# Altium PCB RFCARD-MB-NEW.PcbDoc
Units mm, origin at the board's own origin, x right, y up, seen from the top; angles counter-clockwise.
Board outline 43.48 x 35.86 mm, 6 copper layers (Top Layer, Mid-Layer 1, Mid-Layer 2, Internal Plane 1, Internal Plane 2, Bottom Layer); 6 components, 13 nets, 34 pads, 11 vias.
Unrouted connection lines stored in the file: 6.
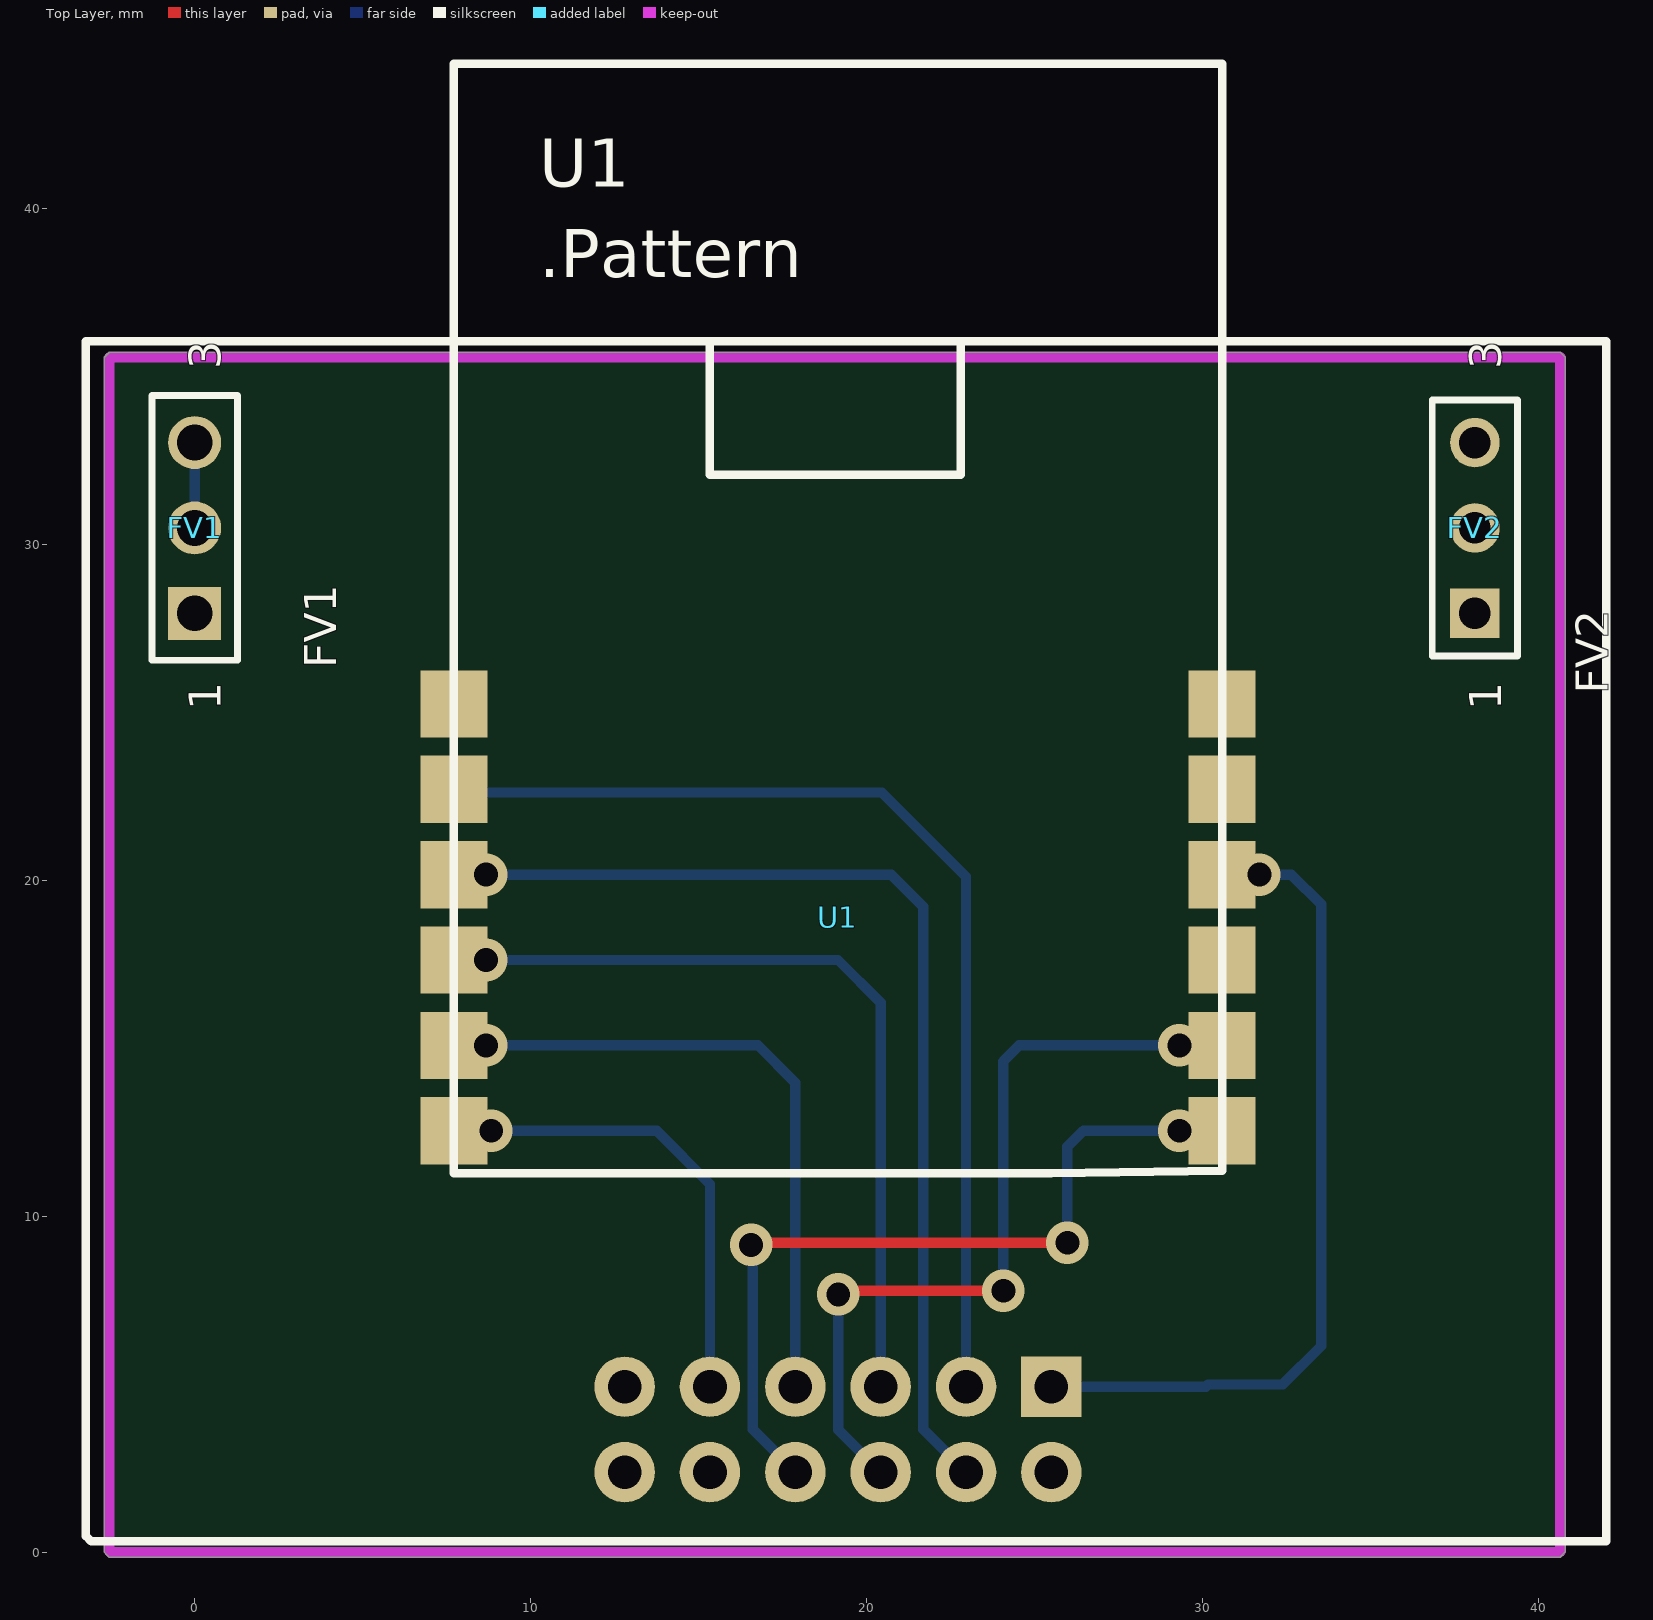
[diagram p0: Top Layer view]
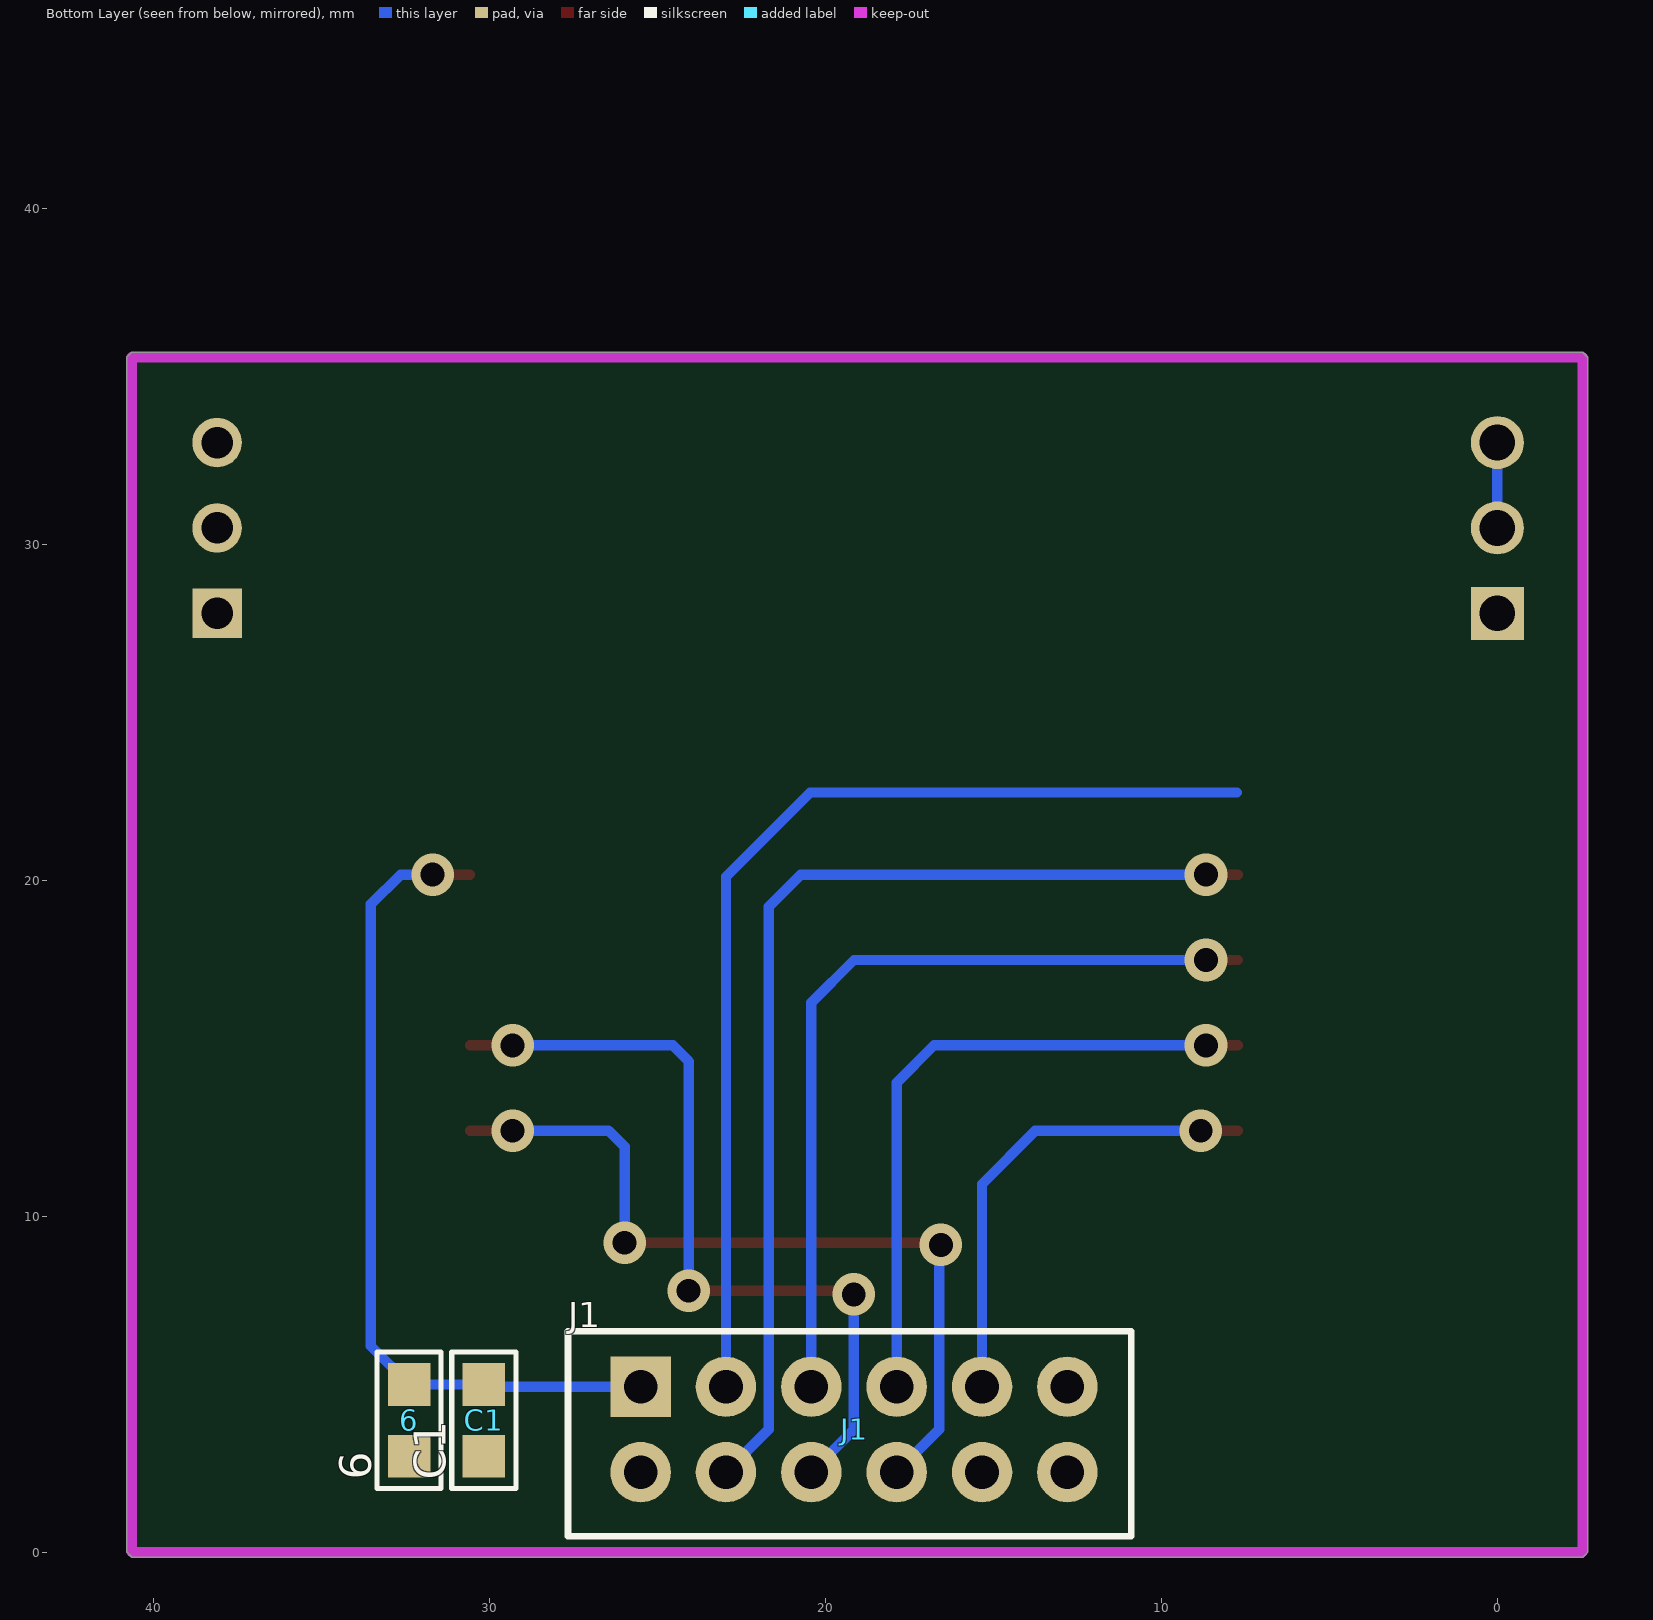
[diagram p1: Bottom Layer view, seen from below]
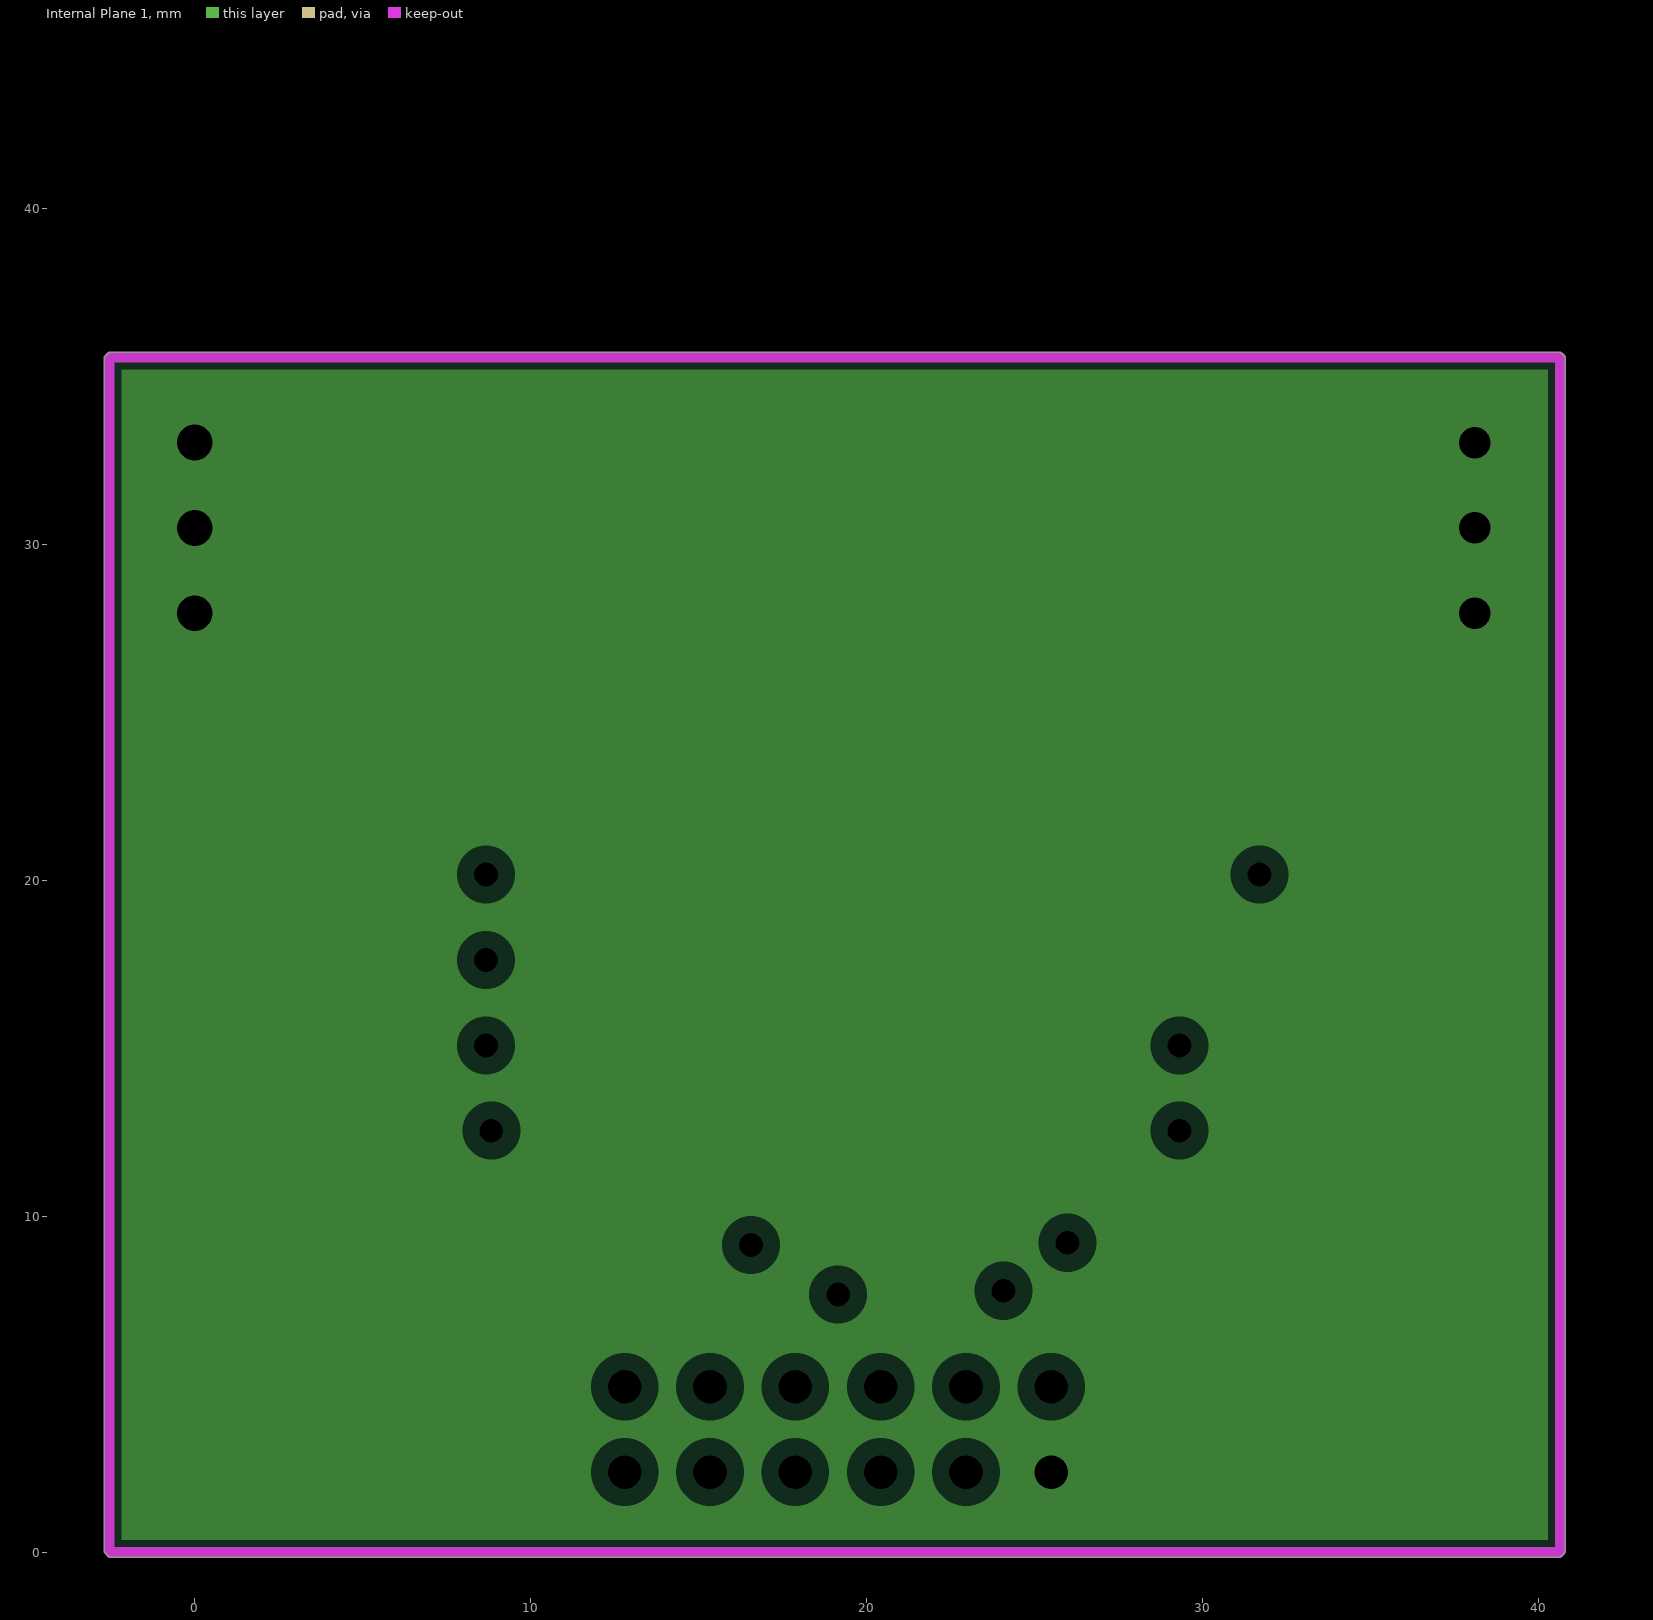
[diagram p2: Internal Plane 1, clearances drawn from the general rule]
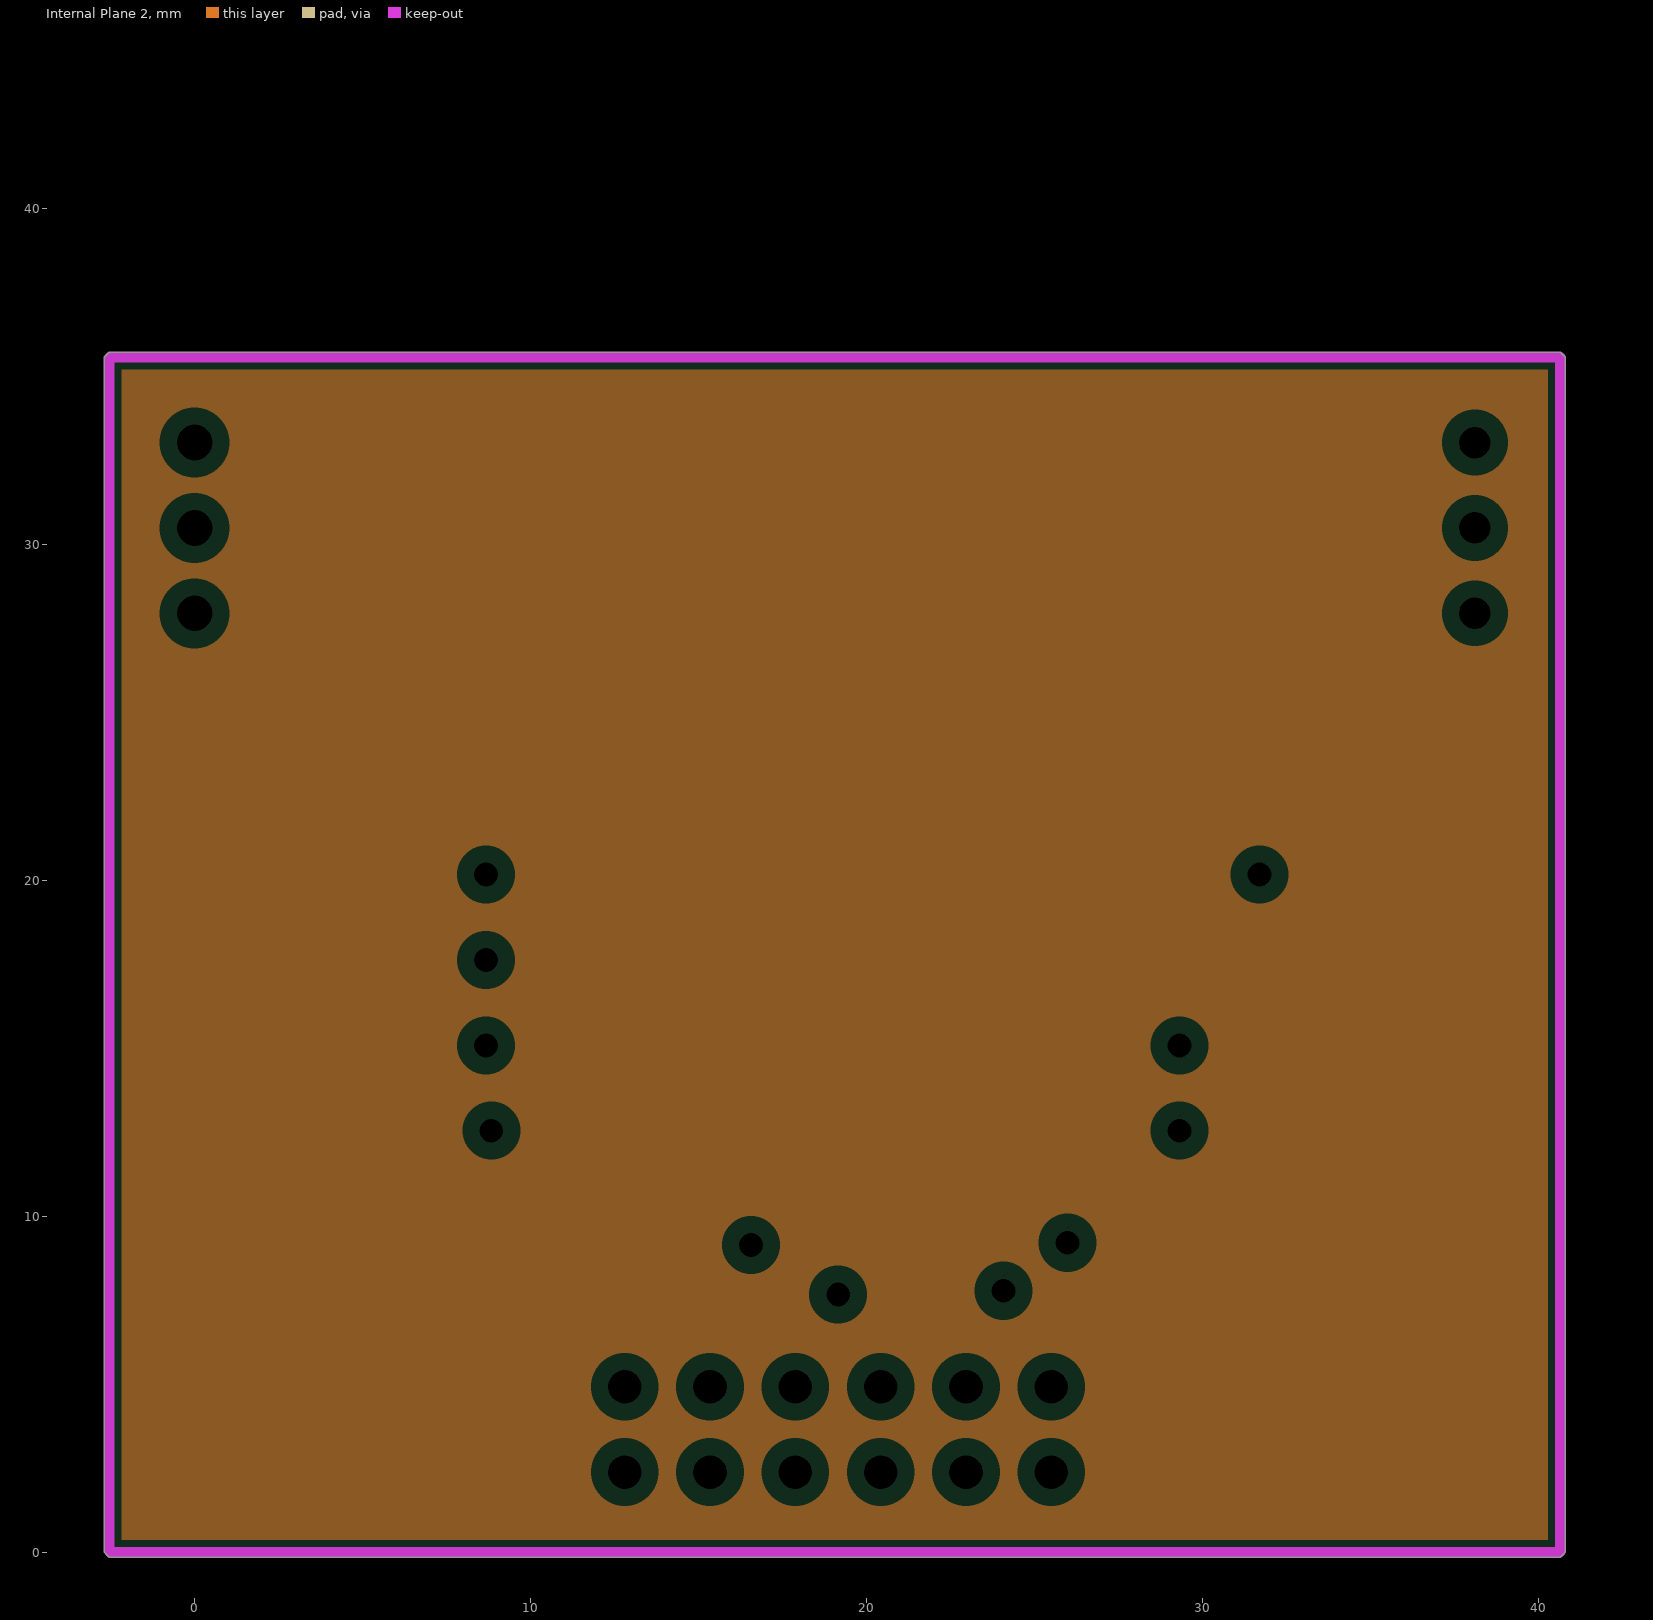
[diagram p3: Internal Plane 2, clearances drawn from the general rule]

## Layer stack, top to bottom
Top Solder: solder mask 0.0102, Solder Resist, Dk 3.5
Top Layer: signal copper 0.0356
Dielectric1: dielectric 0.32, FR-4, Dk 4.8
Mid-Layer 1: signal copper 0.0356
Dielectric2: dielectric 0.32, FR-4, Dk 4.8
Mid-Layer 2: signal copper 0.0356
Dielectric3: dielectric 0.32, FR-4, Dk 4.8
Internal Plane 1: plane copper 0.0356, net GND
Dielectric4: dielectric 0.32, FR-4, Dk 4.8
Internal Plane 2: plane copper 0.0356
Dielectric5: dielectric 0.32, FR-4, Dk 4.8
Bottom Layer: signal copper 0.0356
Bottom Solder: solder mask 0.0102, Solder Resist, Dk 3.5

## Board outline
-2.69,0 -2.54,-0.15 40.64,-0.15 40.79,0 40.79,35.56 40.64,35.71 -2.54,35.71 -2.69,35.56

## Design rules (kind name [scope] priority, off if disabled: settings)
Clearance [All] p1: gap=0.305
PlaneClearance [All] p1: clearance=0.508
PlaneConnect [All] p1: planeconnectstyle=Relief reliefexpansion=0.635 reliefentries=4 reliefconductorwidth=0.305 reliefairgap=0.254
PolygonConnect [All] p1: connectstyle=Relief reliefconductorwidth=0.254 reliefentries=4 polygonreliefangle="90 Angle" airgapwidth=0.254
RoutingVias [All] p1: holewidth=0.711 width=1.27 viastyle="Through Hole" minholewidth=0.711 minwidth=1.27 maxholewidth=0.711 maxwidth=1.27
SilkToSolderMaskClearance SilkscreenOverComponentPads [IsPad] p1: minsilkscreentomaskgap=0.254 clearancetoexposedcopper=TRUE
SolderMaskExpansion [All] p1: expansion=0
UnpouredPolygon [All] p1: allowunpoured=FALSE
Width [All] p1: maxlimit=0.305 minlimit=0.305 preferedwidth=0.305
26 further rules are at their usual default settings.

## Components (designator, comment, footprint, x,y, rotation, side; value= is the part's Value field where it differs from the comment)
6 "" SM/C_0805 32.385,2.857 r270 bottom
C1 "104" SM/C_0805 30.162,2.857 r270 bottom
FV1 "" BLKCON.100/VH/TM1SQS/W.100/3 0,27.94 r90 top
FV2 "" BLKCON.100/VH/TM1SQ/W.100/3 38.1,27.94 r90 top
J1 "CON12A" J6X2 25.495,4.921 r0 bottom
U1 "MRF24J40MA" "MRF24J40MB SM" 7.715,25.241 r0 top

## Footprints (in the part's own frame and the unit in brackets; to place one, negate y for a bottom-side part, rotate by r counter-clockwise, add the part's x,y. Pads: shape width x height; smd on the part's side, far side on the other; paste and mask are expansions set on the pad)
BLKCON.100/VH/TM1SQ/W.100/3 [mil]
  rect 58x58 hole 37: 1(0,0)
  round 58 hole 37: 2(100,0) 3(200,0)
  silkscreen extent -50,-50 250,50
BLKCON.100/VH/TM1SQS/W.100/3 [mil]
  rect 62x62 hole 42: 1(0,0)
  round 62 hole 42: 2(100,0) 3(200,0)
  silkscreen extent -55,-50 255,50
J6X2 [mm]
  rect 1.8x1.8 hole 1 mask-0.301: 1(0,0)
  round 1.8 / inner round 1.575 / far side round 1.8 hole 1 mask-0.098: 2(0,2.54) 3(-2.54,0) 4(-2.54,2.54) 5(-5.08,0) 6(-5.08,2.54) 7(-7.62,0) 8(-7.62,2.54) 9(-10.16,0) 10(-10.16,2.54) 11(-12.7,0) 12(-12.7,2.54)
  silkscreen extent -14.6,-1.65 2.16,4.44
"MRF24J40MB SM" [mm] "Thin QFP, 64-Leads, Body 10x10mm, Pitch 0.5mm, IPC Medium Density"
  rect 2x2 smd: 1(0,0) 2(0,-2.54) 3(0,-5.08) 4(0,-7.62) 5(0,-10.16) 6(0,-12.7) 7(22.86,-12.7) 8(22.86,-10.16) 9(22.86,-7.62) 10(22.86,-5.08) 11(22.86,-2.54) 12(22.86,0)
  silkscreen extent -10.95,-24.92 34.29,19.05
SM/C_0805 [mil]
  rect 50x50 smd: 1(0,0) 2(-84,0)
  silkscreen extent -122,-38 38,38

## Part data
C1: library part Cap, "Capacitor"
U1: library part PIC24FJ128GA306

## Via types
v1: diameter 1.27, hole 0.711, Top Layer to Bottom Layer, 11 vias

## Nets (pads, with @x,y where several pads share a name; then routed paths per layer and width w, separated by ;. In a path a pad name is that pad's centre, name@x,y a point inside that pad or via, vN(x,y) a via of type N, cw(c..) or ccw(c..) an arc to the next point about the centre after c; other vN are vias at no path point)
CS: J1.6 U1.8 | length 24.4
  Top Layer w0.305: v1@19.05,7.62 19.101,7.62 v1(19.152,7.671) ; v1@19.145,7.779 v1(24.066,7.779) ; v1(29.305,15.081) U1.8
  Bottom Layer w0.305: v1(19.152,7.671) 19.152,3.645 J1.6 ; v1(24.066,7.779) 24.066,14.605 24.543,15.081 v1(29.305,15.081)
GND: 6.1 C1.1 FV1.1 FV1.2 FV1.3 FV2.1 FV2.2 FV2.3 J1.2 U1.1 U1.11 U1.12 | length 2.5
  Bottom Layer w0.305: FV1.2 FV1.3
INT: J1.5 U1.4 | length 24.7
  Top Layer w0.305: U1.4 v1(8.668,17.621)
  Bottom Layer w0.305: v1(8.668,17.621) 19.145,17.621 20.415,16.351 J1.5
N1965340: 
N1965651: 
N1965777: 
N1965781: 
RSTMRF: J1.3 U1.2 | length 31.4
  Bottom Layer w0.305: 7.747,22.606 20.447,22.606 22.955,20.098 J1.3
SCK: J1.9 U1.6 | length 14.3
  Top Layer w0.305: U1.6 v1(8.826,12.541)
  Bottom Layer w0.305: v1(8.826,12.541) 13.748,12.541 15.335,10.954 J1.9
SDI: J1.7 U1.5 | length 19.7
  Top Layer w0.305: U1.5 v1(8.668,15.081)
  Bottom Layer w0.305: v1(8.668,15.081) 16.764,15.081 17.875,13.97 J1.7
SDO: J1.8 U1.7 | length 24.7
  Top Layer w0.305: v1(16.561,9.144) v1@16.7,9.144 ; v1@16.605,9.207 v1(25.971,9.207) v1@26.162,9.207 ; v1(29.305,12.541) U1.7
  Bottom Layer w0.305: v1(16.561,9.144) 16.605,9.1 16.605,3.651 J1.8 ; v1(25.971,9.207) 25.971,12.065 26.448,12.541 v1(29.305,12.541)
VCC: 6.2 C1.2 J1.1 U1.10 | length 25
  Top Layer w0.305: U1.10 v1(31.686,20.161)
  Bottom Layer w0.305: J1.1 30.093,4.921 C1.2 6.2 33.528,6.134 33.528,19.279 32.639,20.161 v1(31.686,20.161)
WAKE: J1.4 U1.3 | length 31.7
  Top Layer w0.305: U1.3 v1(8.668,20.161)
  Bottom Layer w0.305: v1(8.668,20.161) 20.733,20.161 21.685,19.209 21.685,3.651 J1.4
pads on no net: J1.10 J1.11 J1.12 U1.9

## Polygon pours and split planes (outlines as drawn)
GND on Internal Plane 1 (split plane): 40.28,0.36 -2.18,0.36 -2.18,35.2 40.28,35.2
no net on Internal Plane 2 (split plane): 40.28,0.36 -2.18,0.36 -2.18,35.2 40.28,35.2

## Keep-outs
Keep-Out Layer:
  lines w0.3: -2.54,0 40.64,0 40.64,35.56 -2.54,35.56 -2.54,0

## Other copper
Internal Plane 1 (plane layer: these items are gaps in the copper):
  lines w0.6: -2.54,0 40.64,0 40.64,35.56 -2.54,35.56 -2.54,0

## Silkscreen, mask and mechanical layers (free items; w line width, h text height)
Drill Drawing:
  lines w0.254: 56.864,-39.656 151.733,-39.656 ; 56.864,-39.529 56.864,-9.049 ; 56.864,-8.922 151.733,-8.922 ; 56.991,-34.449 151.606,-34.449 ; 56.991,-30.639 151.606,-30.639 ; 56.991,-26.829 151.606,-26.829 ; 56.991,-23.019 151.606,-23.019 ; 56.991,-19.209 151.606,-19.209 ; 56.991,-19.082 151.606,-19.082 ; 56.991,-14.129 151.606,-14.129 ; 56.991,-14.002 151.606,-14.002 ; 60.992,-32.544 62.262,-32.544 ; 60.992,-28.734 62.262,-28.734 ; 61.627,-33.179 61.627,-31.909 ; 61.627,-29.369 61.627,-28.099 ; 66.262,-34.449 66.262,-14.129 ; 66.389,-34.449 66.389,-14.129 ; 87.704,-34.449 87.704,-14.129 ; 108.193,-39.529 108.193,-14.129 ; 122.29,-39.529 122.29,-14.129 ; 151.733,-39.529 151.733,-9.049 ; 60.992,-25.559 60.992,-24.289 ; 60.992,-25.559 62.262,-25.559 ; 60.992,-25.559 62.262,-24.289 ; 60.992,-24.289 62.262,-24.289 ; 60.992,-24.289 62.262,-25.559 ; 62.262,-25.559 62.262,-24.289 ; 56.991,-39.529 151.606,-39.529 151.606,-9.049 56.991,-9.049 56.991,-39.529 ; 60.992,-33.179 60.992,-31.909 62.262,-31.909 62.262,-33.179 60.992,-33.179 ; 60.992,-21.114 61.627,-20.479 62.262,-21.114 61.627,-21.749 60.992,-21.114
  text ".Legend" at 56.991,-9.049 h1.52

## Text inside footprints (layer, text, board x,y; h text height)
FV1: Top Overlay "3" at 0.778,35.207 h0.95 r90; Top Overlay "1" at 0.778,25.047 h0.95 r90; Mechanical 1 "3" at 0.778,35.207 h0.95 r90; Mechanical 1 "1" at 0.778,25.047 h0.95 r90
FV2: Top Overlay "1" at 38.878,25.047 h0.95 r90; Top Overlay "3" at 38.878,35.207 h0.95 r90; Mechanical 1 "1" at 38.878,25.047 h0.95 r90; Mechanical 1 "3" at 38.878,35.207 h0.95 r90